# Altium PCB PCB1.PcbDoc
Units mm, origin at the board's own origin, x right, y up, seen from the top; angles counter-clockwise.
Board outline 41.69 x 48.84 mm, 2 copper layers (Top Layer, Bottom Layer); 8 components, 10 nets, 46 pads, 0 vias.
Unrouted connection lines stored in the file: 8.
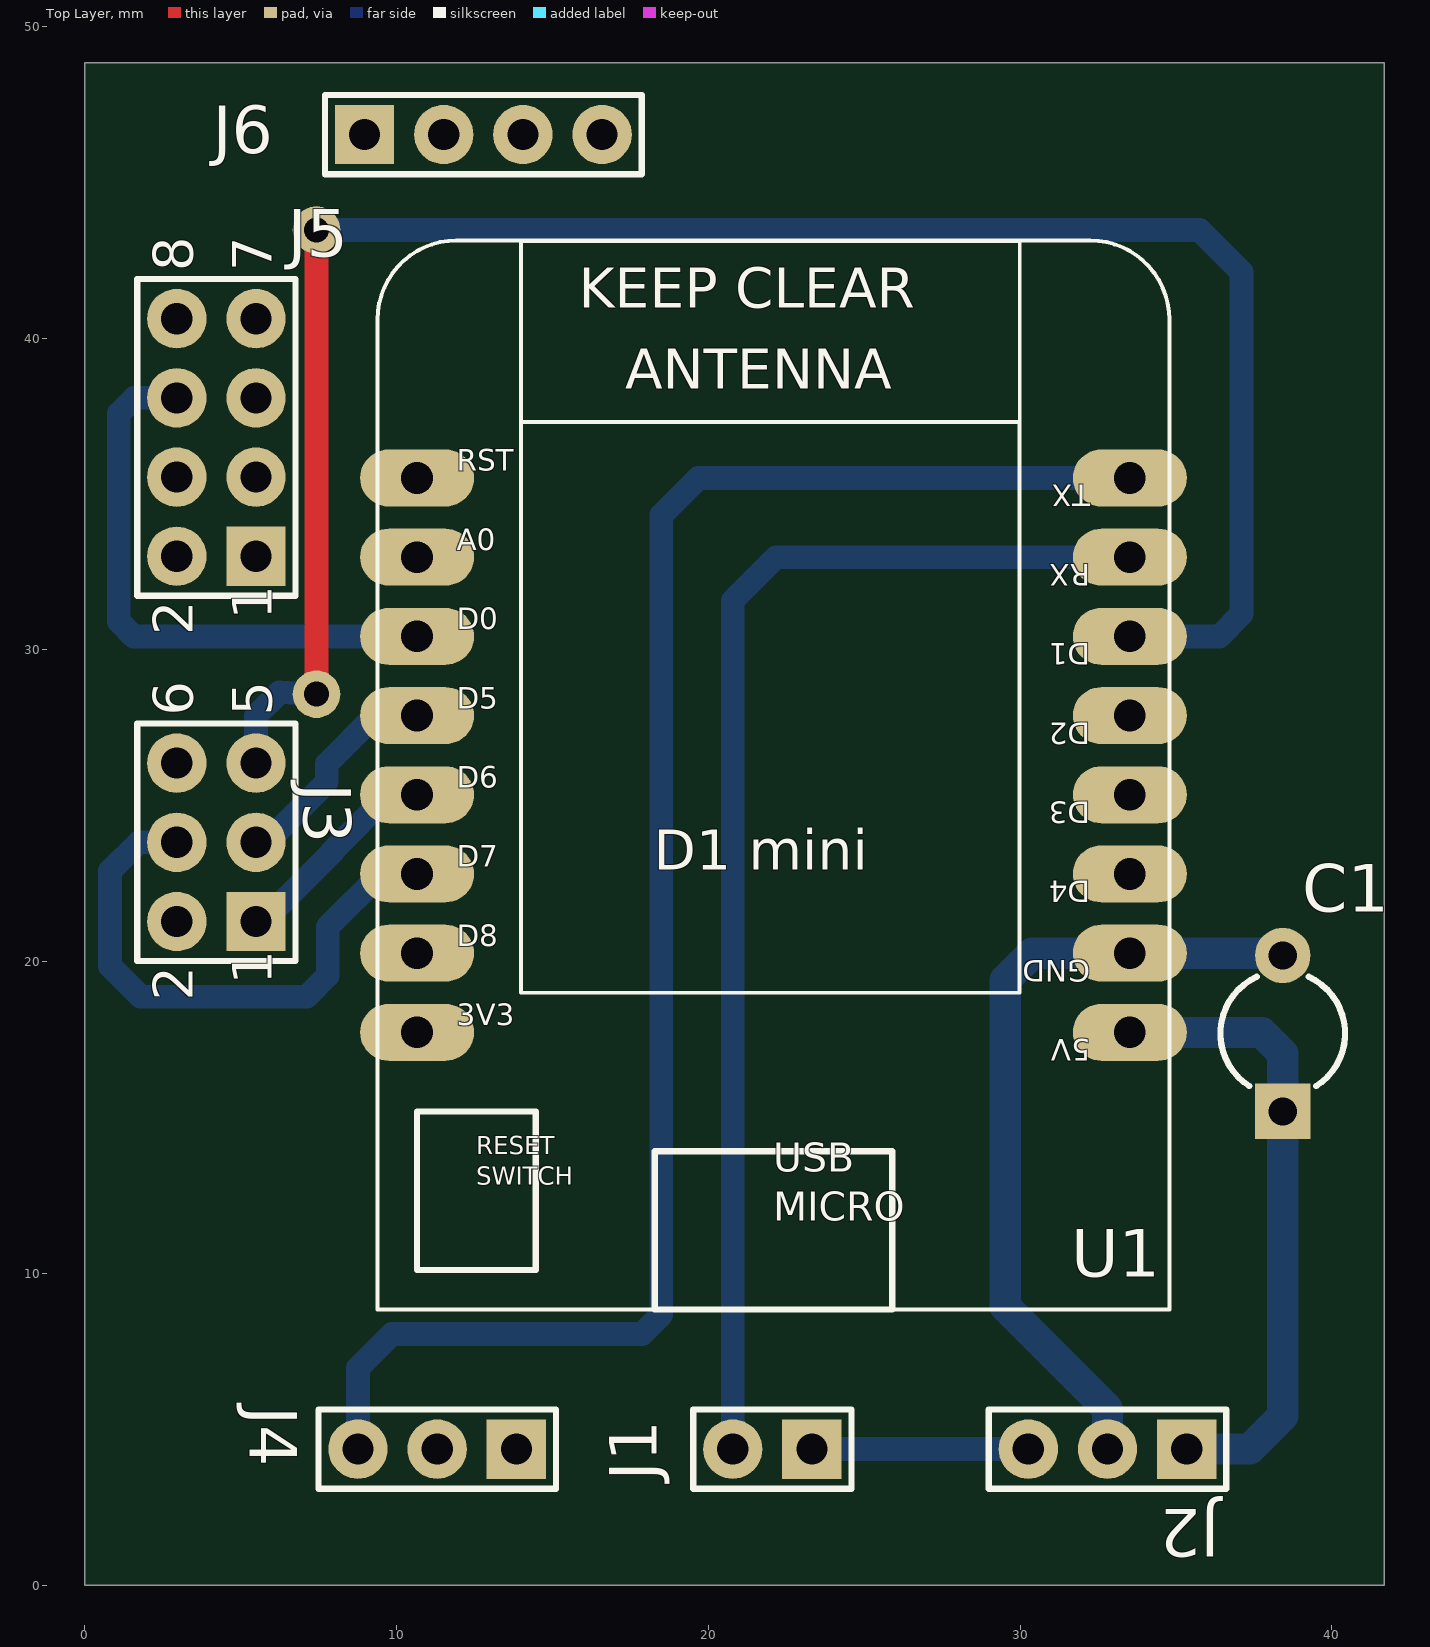
[diagram p0: Top Layer view]
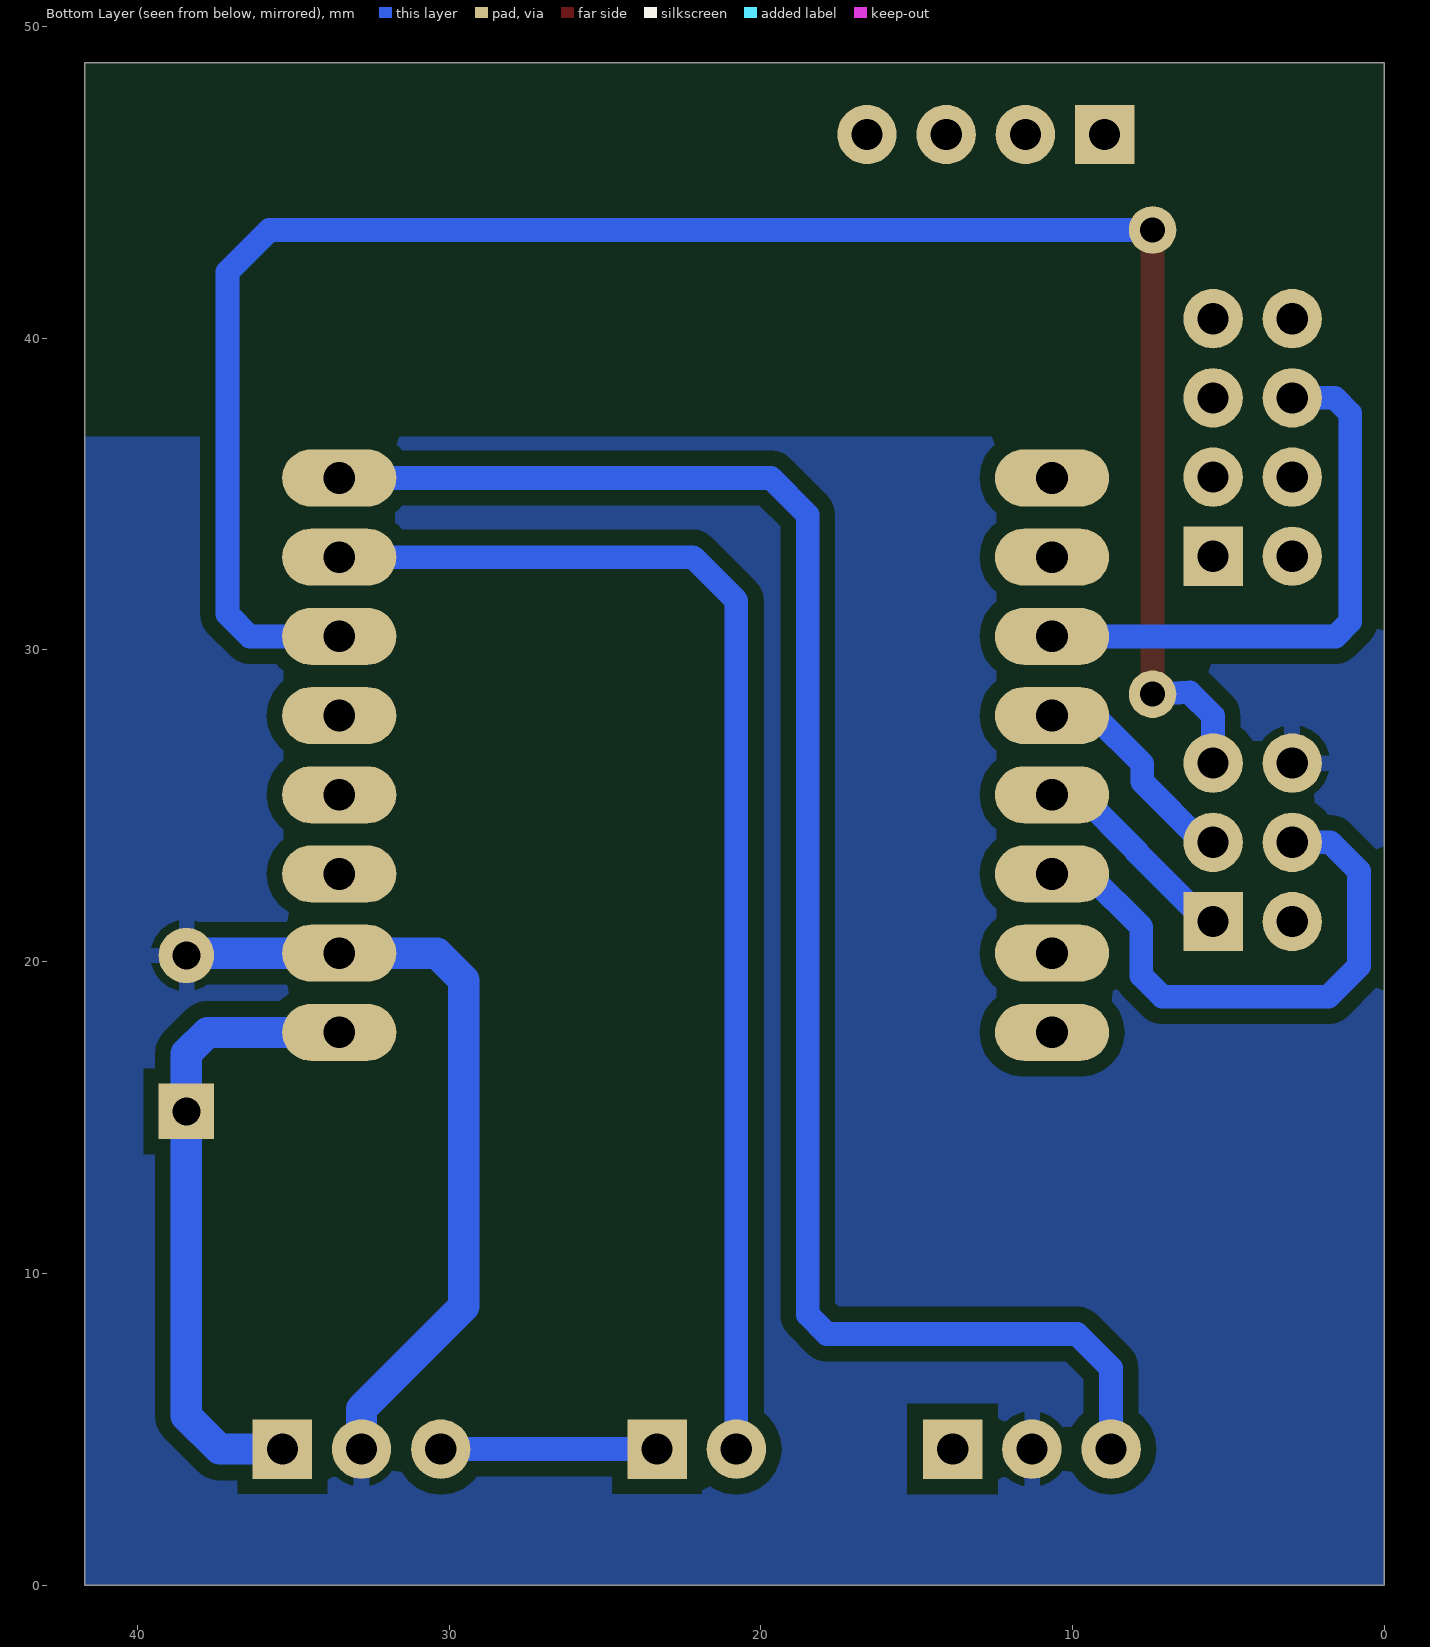
[diagram p1: Bottom Layer view, seen from below]

## Layer stack, top to bottom
Top Solder: solder mask 0.0102, Solder Resist, Dk 3.5
Top Layer: signal copper 0.0356
Dielectric 1: dielectric 0.32, FR-4, Dk 4.8
Bottom Layer: signal copper 0.0356
Bottom Solder: solder mask 0.0102, Solder Resist, Dk 3.5

## Board outline
41.685,48.835 0,48.835 0,0 41.685,0

## Design rules (kind name [scope] priority, off if disabled: settings)
Clearance [All] p1: gap=0.5
PlaneConnect [All] p1: planeconnectstyle=Relief reliefexpansion=0.508 reliefentries=4 reliefconductorwidth=0.5 reliefairgap=0.254
PolygonConnect [All] p1: connectstyle=Relief reliefconductorwidth=0.5 reliefentries=4 polygonreliefangle="90 Angle" airgapwidth=0.254
RoutingVias [All] p1: holewidth=0.711 width=1.27 viastyle="Through Hole" minholewidth=0.711 minwidth=1.27 maxholewidth=0.711 maxwidth=1.27
SolderMaskExpansion [All] p1: expansion=0.102
Width [All] p1: maxlimit=1.2 minlimit=0.762 preferedwidth=0.762
29 further rules are at their usual default settings.

## Components (designator, comment, footprint, x,y, rotation, side; value= is the part's Value field where it differs from the comment)
C1 "Cap Pol1" CAPR5-4X5 38.425,17.7 r90 top
J1 "Header 2" HDR1X2 23.325,4.37 r180 top
J2 "Header 3" HDR1X3 35.345,4.37 r180 top
J3 "Header 3X2" HDR2X3 5.495,21.29 r90 top
J4 "Header 3" HDR1X3 13.845,4.37 r180 top
J5 "Header 4X2" HDR2X4 5.495,33.005 r90 top
J6 "Fixação" HDR1X4 8.975,46.53 r0 top
U1 "WEMOS-D1-MINI" WEMOS-D1-MINI 20.82,27.895 r0 top

## Footprints (in the part's own frame and the unit in brackets; to place one, negate y for a bottom-side part, rotate by r counter-clockwise, add the part's x,y. Pads: shape width x height; smd on the part's side, far side on the other; paste and mask are expansions set on the pad)
CAPR5-4X5 [mm] "Capacitor; 2 Leads"
  rect 1.778x1.778 hole 0.9: 1(-2.5,0)
  round 1.778 hole 0.9: 2(2.5,0)
  silkscreen extent -1.69,-2 1.82,2
HDR1X2 [mm] "Connector; Header; 2 Position"
  rect 1.905x1.905 hole 1: 1(0,0)
  round 1.905 hole 1: 2(2.54,0)
  silkscreen extent -1.27,-1.27 3.81,1.27
HDR1X3 [mm] "Connector; Header; 3 Position"
  rect 1.905x1.905 hole 1: 1(0,0)
  round 1.905 hole 1: 2(2.54,0) 3(5.08,0)
  silkscreen extent -1.27,-1.27 6.35,1.27
HDR1X4 [mm] "Connector; Header; 4 Position"
  rect 1.905x1.905 hole 1: 1(0,0)
  round 1.905 hole 1: 2(2.54,0) 3(5.08,0) 4(7.62,0)
  silkscreen extent -1.27,-1.27 8.89,1.27
HDR2X3 [mm] "Connector; Header; 3x2 Position"
  rect 1.905x1.905 hole 1: 1(0,0)
  round 1.905 hole 1: 2(0,2.54) 3(2.54,0) 4(2.54,2.54) 5(5.08,0) 6(5.08,2.54)
  silkscreen extent -1.27,-1.27 6.35,3.81
HDR2X4 [mm] "Connector; Header; 4x2 Position"
  rect 1.905x1.905 hole 1: 1(0,0)
  round 1.905 hole 1: 2(0,2.54) 3(2.54,0) 4(2.54,2.54) 5(5.08,0) 6(5.08,2.54) 7(7.62,0) 8(7.62,2.54)
  silkscreen extent -1.27,-1.27 8.89,3.81
WEMOS-D1-MINI [mil]
  oval 144x72 hole 40: 3V3(-400,-400) 5V(500,-400) A0(-400,200) D0(-400,100) D1(500,100) D2(500,0) D3(500,-100) D4(500,-200) D5(-400,0) D6(-400,-100) D7(-400,-200) D8(-400,-300) GND(500,-300) RESET(-400,300) RX(500,200) TX(500,300)
  silkscreen extent -450,-750 550,600

## Part data
C1: "Polarized Capacitor (Radial)"
J1: "Header, 2-Pin"
J2 J4: "Header, 3-Pin"
J3: "Header, 3-Pin, Dual row"
J5: "Header, 4-Pin, Dual row"
J6: library part "Header 4", "Header, 4-Pin"

## Free pads (board coordinates)
  round 1.524 hole 0.8: 2(7.435,28.58) 2(7.435,43.47)

## Nets (pads, with @x,y where several pads share a name; then routed paths per layer and width w, separated by ;. In a path a pad name is that pad's centre, name@x,y a point inside that pad or via, vN(x,y) a via of type N, cw(c..) or ccw(c..) an arc to the next point about the centre after c; other vN are vias at no path point)
GND: C1.2 J2.2 J3.6 J4.2 J5.7 U1.GND | length 25.6
  Bottom Layer w1: J2.2 32.805,5.66 29.525,8.94 29.525,19.41 30.39,20.275 U1.GND C1.2@38.35,20.275
NetJ1_1: J1.1 J2.3 | length 6.9
  Bottom Layer w0.762: J1.1 J2.3
NetJ1_2: J1.2 U1.RX | length 40.5
  Bottom Layer w0.762: J1.2 20.785,31.58 22.18,32.975 U1.RX
NetJ3_1: J3.1 J5.3 U1.D6 | length 6.9
  Bottom Layer w0.762: J3.1 5.725,21.29 7.95,23.515 7.95,23.559 9.747,25.355 U1.D6
NetJ3_3: J3.3 J5.5 U1.D5 | length 7.2
  Bottom Layer w0.762: J3.3 5.825,23.83 7.765,25.77 7.765,26.35 9.31,27.895 U1.D5
NetJ3_4: J3.4 J5.4 U1.D7 | length 18.4
  Bottom Layer w0.762: J3.4 1.735,23.83 0.815,22.91 0.815,19.86 1.795,18.88 7.125,18.88 7.795,19.55 7.795,21.11 9.5,22.815 U1.D7
NetJ3_5: J3.5 pad.2 U1.D1 | length 63.7
  Top Layer w0.762: pad.2@7.435,28.58 pad.2@7.435,43.47
  Bottom Layer w0.762: J3.5 5.495,27.89 6.245,28.64 pad.2@7.435,28.58 ; pad.2@7.435,43.47 35.755,43.47 37.105,42.12 37.105,31.15 36.39,30.435 U1.D1
NetJ4_3: J4.3 U1.TX | length 54.2
  Bottom Layer w0.762: J4.3 8.765,6.97 9.855,8.06 17.875,8.06 18.495,8.68 18.495,34.33 19.68,35.515 U1.TX
NetJ5_6: J5.6 U1.D0 | length 18.5
  Bottom Layer w0.762: J5.6 1.59,38.085 1.095,37.59 1.095,30.91 1.57,30.435 U1.D0
VCC: C1.1 J2.1 J3.2 J4.1 J5.1 U1.5V | length 20.3
  Bottom Layer w1: U1.5V 37.75,17.735 38.425,17.06 C1.1 38.425,5.43 37.365,4.37 J2.1
pads on no net: J5.2 J5.8 J6.1 J6.2 J6.3 J6.4 U1.3V3 U1.A0 U1.D2 U1.D3 U1.D4 U1.D8 U1.RESET

## Polygon pours and split planes (outlines as drawn)
GND on Bottom Layer "Top Layer-No Net" (solid, remove dead copper, pour order 0): 41.685,36.84 0,36.84 0,0 41.685,0

## Silkscreen, mask and mechanical layers (free items; w line width, h text height)
Mechanical 1:
  lines w0.254: 0,0 41.7,0 41.7,48.8 0,48.8 0,0

## Text inside footprints (layer, text, board x,y; h text height)
J3: Top Overlay "6" at 3.463,27.894 h1.27 r90; Top Overlay "5" at 6.003,27.894 h1.27 r90; Top Overlay "2" at 3.463,18.75 h1.27 r90; Top Overlay "1" at 6.003,19.258 h1.27 r90
J5: Top Overlay "2" at 3.463,30.465 h1.27 r90; Top Overlay "1" at 6.003,30.973 h1.27 r90; Top Overlay "7" at 6.003,42.149 h1.27 r90; Top Overlay "8" at 3.463,42.149 h1.27 r90
U1: Top Overlay "SWITCH" at 12.565,12.655 h0.98; Top Overlay "RESET" at 12.565,13.639 h0.98; Top Overlay "MICRO" at 22.09,11.385 h1.57; Top Overlay "USB" at 22.09,12.96 h1.57; Top Overlay "KEEP CLEAR" at 15.845,40.546 h2.2; Top Overlay "ANTENNA" at 17.345,37.946 h2.2; Top Overlay "TX" at 32.25,35.515 h1.18 r180; Top Overlay "RX" at 32.25,32.975 h1.18 r180; Top Overlay "D1" at 32.25,30.435 h1.18 r180; Top Overlay "D2" at 32.25,27.895 h1.18 r180; Top Overlay "D3" at 32.25,25.355 h1.18 r180; Top Overlay "D4" at 32.25,22.815 h1.18 r180; Top Overlay "GND" at 32.25,20.275 h1.18 r180; Top Overlay "5V" at 32.25,17.735 h1.18 r180; Top Overlay "3V3" at 11.93,17.735 h1.18; Top Overlay "D8" at 11.93,20.275 h1.18; Top Overlay "D7" at 11.93,22.815 h1.18; Top Overlay "D6" at 11.93,25.355 h1.18; Top Overlay "D5" at 11.93,27.895 h1.18; Top Overlay "D0" at 11.93,30.435 h1.18; Top Overlay "A0" at 11.93,32.975 h1.18; Top Overlay "RST" at 11.93,35.515 h1.18; Top Overlay "D1 mini" at 18.245,22.516 h2.2